# Altium PCB HOST.PcbDoc (part 1 of 2)
Units mil, origin at the board's own origin, x right, y up, seen from the top; angles counter-clockwise.
Board outline 6000 x 4000 mil, 2 copper layers (Top Layer, Bottom Layer); 110 components, 88 nets, 329 pads, 175 vias.
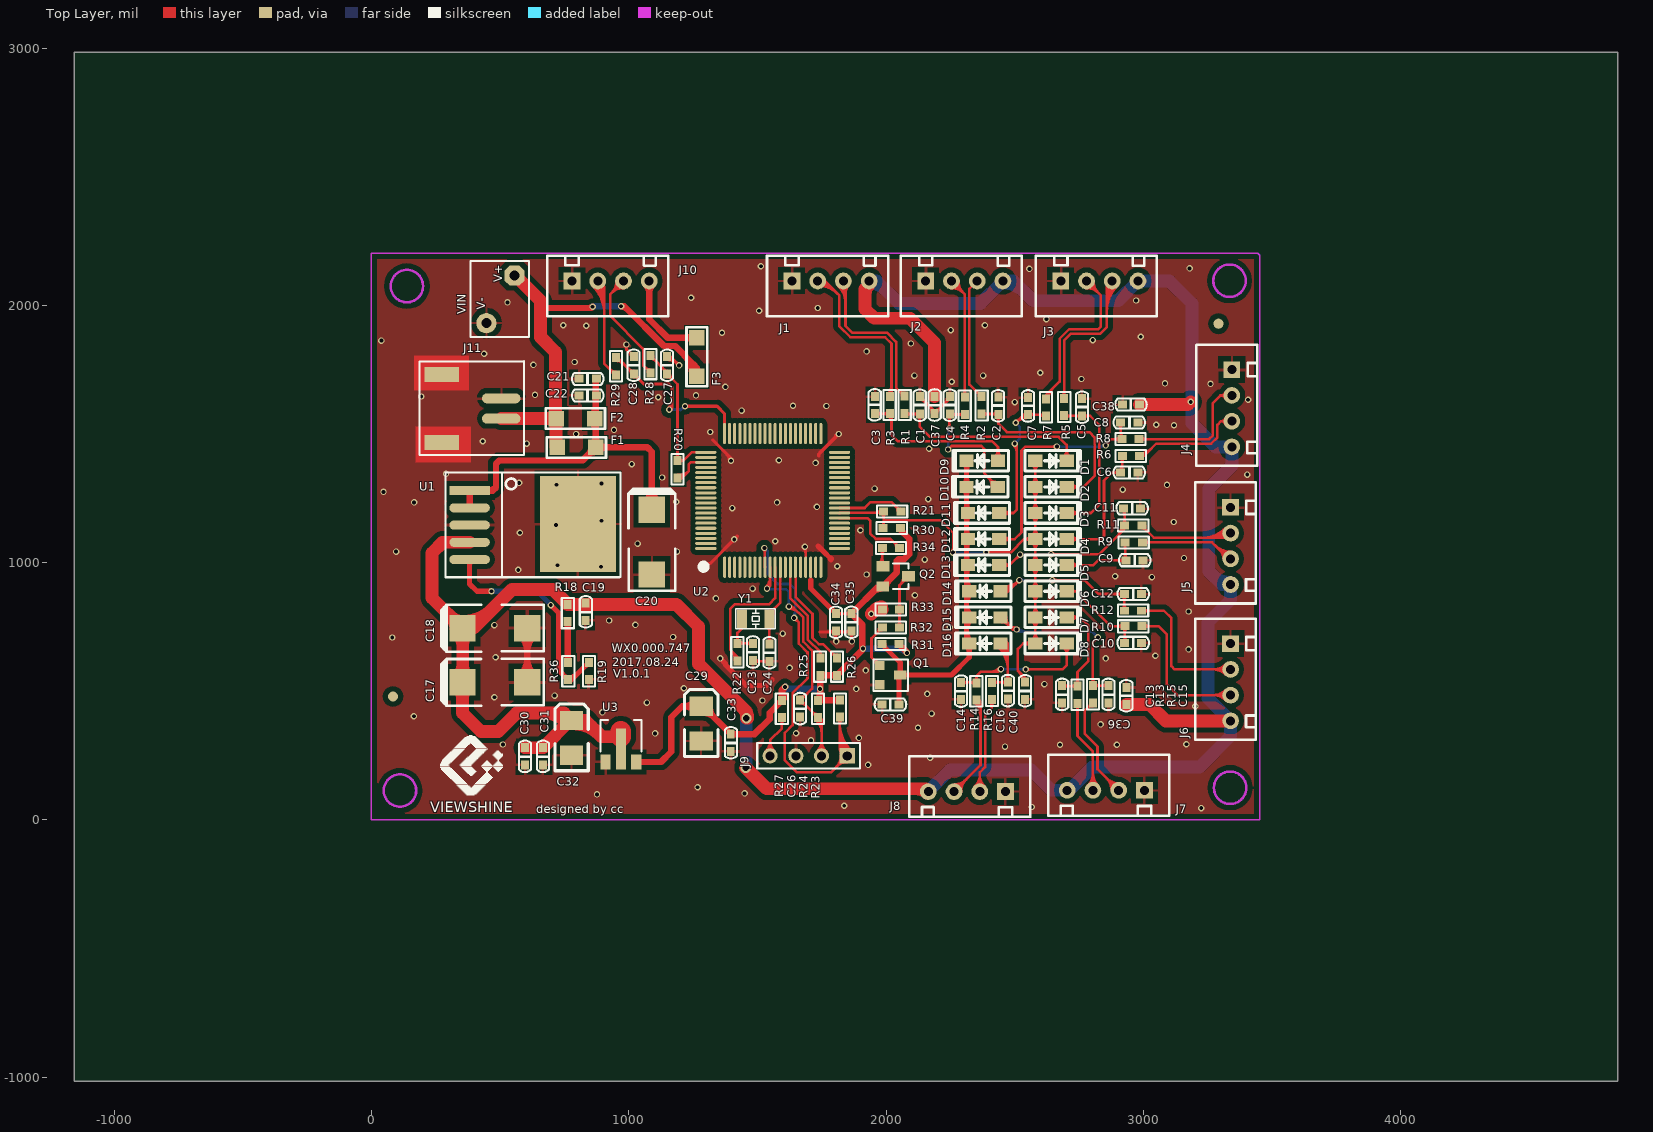
[diagram p0: Top Layer view]
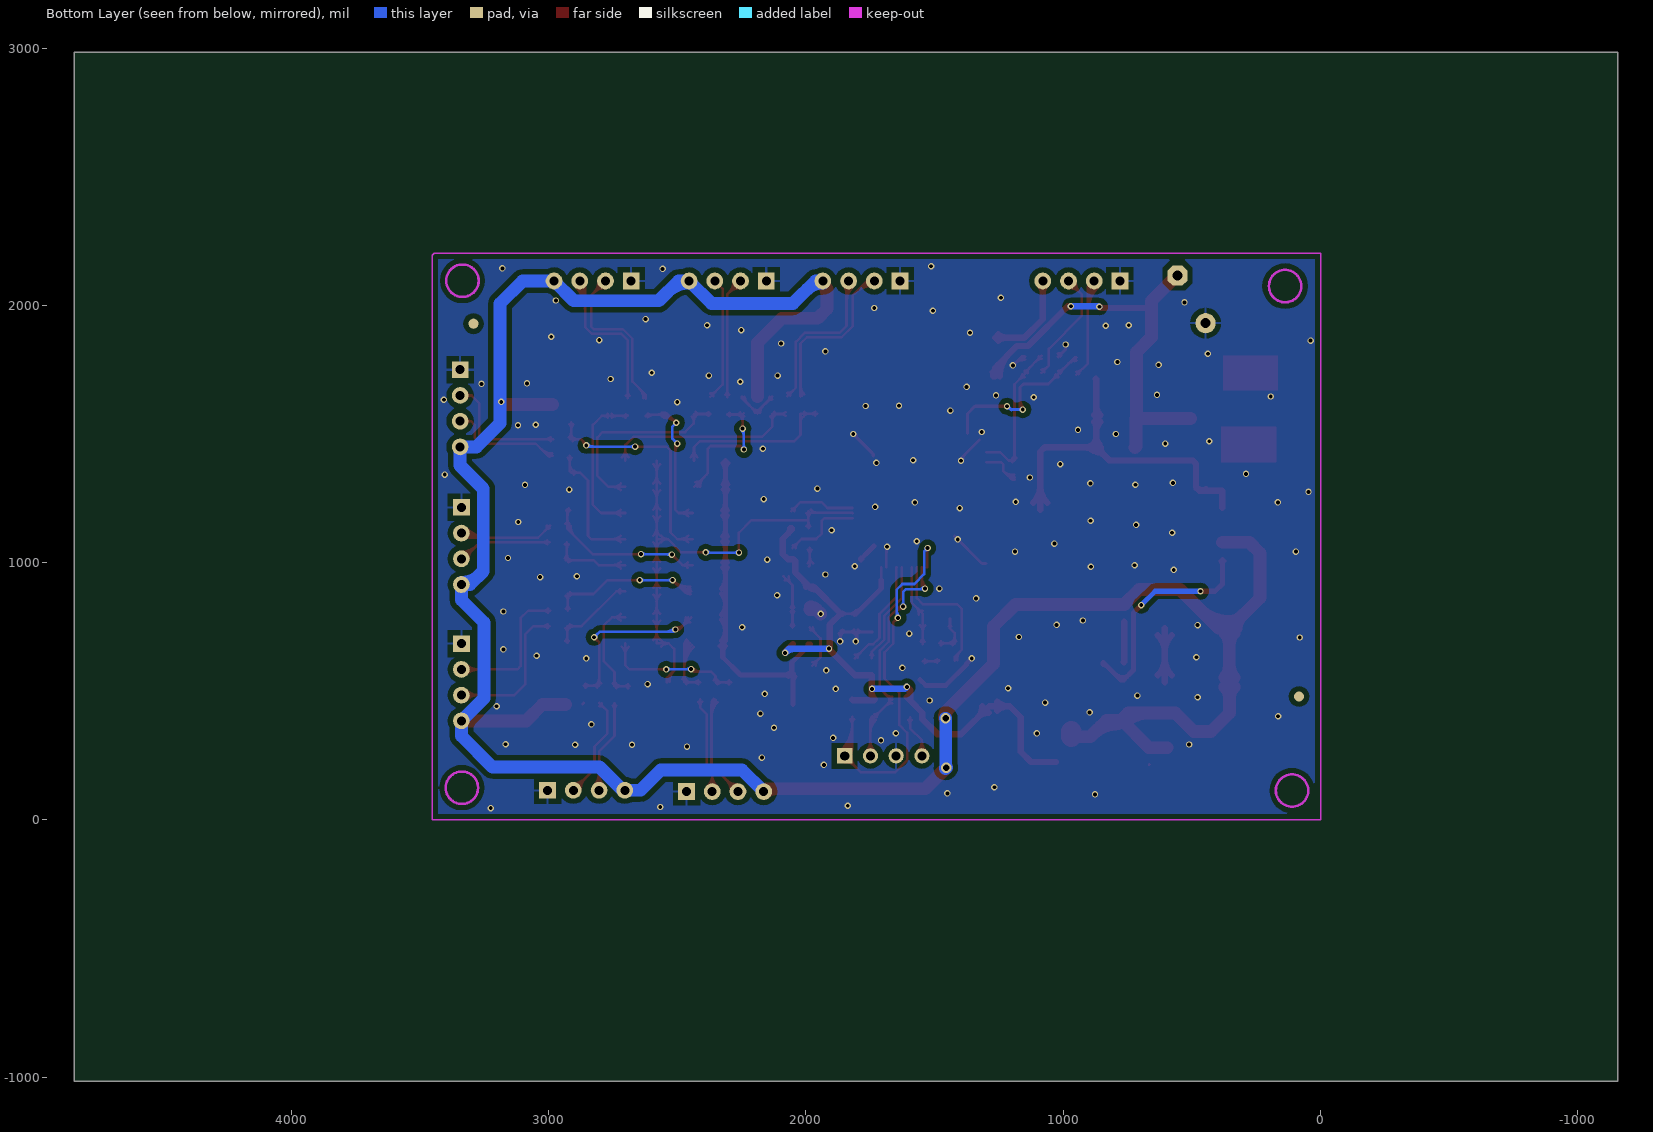
[diagram p1: Bottom Layer view, seen from below]

## Layer stack, top to bottom
Top Solder: solder mask 0.4, Solder Resist, Dk 3.5
Top Layer: signal copper 1.4
Dielectric1: dielectric 12.6, FR-4, Dk 4.8
Bottom Layer: signal copper 1.4
Bottom Solder: solder mask 0.4, Solder Resist, Dk 3.5

## Board outline
-1156,-1016 4844,-1016 4844,2984 -1156,2984

## Design rules (kind name [scope] priority, off if disabled: settings)
Clearance Clearance_1 [inpolygon] p1: gap=20 ignorepadtopadclearanceinfootprint=FALSE except(0: Arc-Hole Track-Hole SMDPad-Hole THPad-Hole Via-Hole Fill-Hole Poly-Hole Region-Hole Text-Hole)
Clearance [All] p2: gap=7.8 ignorepadtopadclearanceinfootprint=FALSE except(0: Arc-Hole Track-Hole SMDPad-Hole THPad-Hole Via-Hole Fill-Hole Poly-Hole Region-Hole Text-Hole)
ComponentClearance [All] p1 off: gap=10 collisioncheckmode=3 verticalgap=10 showdistances=FALSE
PolygonConnect PolygonConnect_1 [Isvia] p1: connectstyle=Direct reliefconductorwidth=10 reliefentries=4 polygonreliefangle="90 Angle" airgapwidth=10
PolygonConnect [All] p2: connectstyle=Relief reliefconductorwidth=10 reliefentries=4 polygonreliefangle="90 Angle" airgapwidth=10
RoutingVias [All] p1: holewidth=15 width=25 viastyle="Through Hole" minholewidth=15 minwidth=25 maxholewidth=28 maxwidth=50
SilkToSilkClearance [All] p1 off: silktosilkclearance=10
SilkToSolderMaskClearance SilkscreenOverComponentPads [IsPad] p1 off: minsilkscreentomaskgap=10 clearancetoexposedcopper=TRUE
SolderMaskExpansion [All] p1: expansion=4
Width [All] p1: maxlimit=500 minlimit=10 preferedwidth=10
27 further rules are at their usual default settings.

## Classes and differential pairs
component class 主机板: C17 C18 C19 C20 C21 C22 C23 C24 C26 C27 C28 C29 C30 C31 C32 C33 C34 C35 F1 F2 F3 J9 J10 J11 R18 R19 R20 R21 R22 R23 R24 R25 R26 R27 R28 R29 R36 U1 U2 U3 VIN Y1
component class 主机板2: C1 C2 C3 C4 C5 C6 C7 C8 C9 C10 C11 C12 C13 C14 C15 C16 C36 C37 C38 C39 C40 D1 D2 D3 D4 D5 D6 D7 D8 D9 D10 D11 D12 D13 D14 D15 D16 J1 J2 J3 J4 J5 J6 J7 J8 Q1 Q2 R1 R2 R3 R4 R5 R6 R7 R8 R9 R10 R11 R12 R13 R14 R15 R16 R30 R31 R32 R33 R34

## Components (designator, comment, footprint, x,y, rotation, side; value= is the part's Value field where it differs from the comment)
C1 "100p" C0603 2131,1645 r270 top
C2 "100p" C0603 2436,1643 r270 top
C3 "100p" C0603 1956,1646 r270 top
C4 "100p" C0603 2247.67,1645 r270 top
C5 "100p" C0603 2762,1637 r270 top
C6 "100p" C0603 2978,1350 r180 top
C7 "100p" C0603 2552,1642 r270 top
C8 "100p" C0603 2978,1545 r180 top
C9 "100p" C0603 2999,1009 r180 top
C10 "100p" C0603 2993,688 r180 top
C11 "100p" C0603 2989,1211 r180 top
C12 "100p" C0603 2993,878 r180 top
C13 "100p" C0603 2684,455 r90 top
C14 "100p" C0603 2291,468 r90 top
C15 "100p" C0603 2864,455 r90 top
C16 "100p" C0603 2473,470 r90 top
C17 "470uF" 7343 479,535 r0 top
C18 "470uF" 7343 479,745 r0 top
C19 "0.1uF" C0603 832,776 r90 top
C20 "220uF/10V" 7343 1089,1080 r270 top
C21 "100P" C0603 807,1715 r0 top
C22 "0.1uF" C0603 807,1650 r0 top
C23 "10Pf" c0603 1482,620 r90 top
C24 "10Pf" c0603 1546,617 r90 top
C26 "0.1μF" C0603 1665,400 r90 top
C27 "100p" C0603 1149,1800 r270 top
C28 "100p" C0603 1019,1800 r270 top
C29 "100uF" 3528 1281,442 r90 top
C30 "0.1uF" C0603 596,214 r90 top
C31 "100p" C0603 666,214 r90 top
C32 "100uF" 3528 777,386 r90 top
C33 "0.1uF" C0603 1396,267 r90 top
C34 "0.1uF" C0603 1805,801 r270 top
C35 "10uF" C0603 1865,801 r270 top
C36 "0.1u" C0603 2934,515 r270 top
C37 "0.1u" C0603 2188.33,1580 r90 top
C38 "0.1u" C0603 2919,1615 r0 top
C39 "100p" C0603 1984,449 r0 top
C40 "100p" C0603 2540,469 r90 top
D1 "DSK14" SOD-123FL 2580,1396 r0 top
D2 "DSK14" SOD-123FL 2580,1294.57 r0 top
D3 "DSK14" SOD-123FL 2580,1193.14 r0 top
D4 "DSK14" SOD-123FL 2580,1091.71 r0 top
D5 "DSK14" SOD-123FL 2580,990.29 r0 top
D6 "DSK14" SOD-123FL 2580,888.86 r0 top
D7 "DSK14" SOD-123FL 2580,787.43 r0 top
D8 "DSK14" SOD-123FL 2580,686 r0 top
D9 "DSK14" SOD-123FL 2435,1396 r180 top
D10 "DSK14" SOD-123FL 2434,1294.57 r180 top
D11 "DSK14" SOD-123FL 2440,1193.14 r180 top
D12 "DSK14" SOD-123FL 2440,1091.71 r180 top
D13 "DSK14" SOD-123FL 2440,990.29 r180 top
D14 "DSK14" SOD-123FL 2445,888.86 r180 top
D15 "DSK14" SOD-123FL 2445,787.43 r180 top
D16 "DSK14" SOD-123FL 2445,686 r180 top
F1 "1A" R1206 796,1448 r0 top
F2 "1A" R1206 792,1560 r0 top
F3 "1A" R1206 1264,1800 r270 top
J1 "Header 4" HDX4-2.54 1784,2095 r90 top
J2 "Header 4" HDX4-2.54 2304,2095 r90 top
J3 "Header 4" HDX4-2.54 2829,2095 r90 top
J4 "Header 4" HDX4-2.54 3344,1600 r0 top
J5 "Header 4" HDX4-2.54 3339,1065 r0 top
J6 "Header 4" HDX4-2.54 3339,535 r0 top
J7 "Header 4" HDX4-2.54 2854,115 r270 top
J8 "Header 4" HDX4-2.54 2314,110 r270 top
J9 "Header 4" HDR1X4 1849,249 r180 top
J10 "Header 4" HDX4-2.54 929,2095 r90 top
J11 "Header 2" SMT2-2.0 504,1560 r90 top
Q1 "9013" SOT-23-TRAN 2010,563 r270 top
Q2 "9012" SOT23-9013 1987,907 r270 top
R1 "22" R0603 2071.67,1580 r90 top
R2 "22" R0603 2371,1578 r90 top
R3 "22" R0603 2014.33,1646 r270 top
R4 "22" R0603 2306,1643 r270 top
R5 "22" R0603 2692,1572 r90 top
R6 "22" R0603 2918,1415 r0 top
R7 "22" R0603 2622,1637 r270 top
R8 "22" R0603 2983,1480 r180 top
R9 "22" R0603 2929,1079 r0 top
R10 "22" R0603 2928,753 r0 top
R11 "22" R0603 2994,1144 r180 top
R12 "22" R0603 2993,813 r180 top
R13 "22" R0603 2744,520 r270 top
R14 "22" R0603 2351,533 r270 top
R15 "22" R0603 2804,455 r90 top
R16 "22" R0603 2411,468 r90 top
R18 "30k" R0603 762,771 r90 top
R19 "10k" R0603 844,545 r90 top
R20 "100" r0603 1189,1330 r90 top
R21 "100" R0603 1990,1199 r0 top
R22 "100K" r0603 1422,685 r270 top
R23 "1K" R0603 1820,400 r90 top
R24 "20kΩ" R0603 1735,465 r270 top
R25 "10k" r0603 1744,629 r270 top
R26 "10k" r0603 1809,629 r270 top
R27 "10Ω" R0603 1595,465 r270 top
R28 "22" R0603 1084,1805 r270 top
R29 "22" R0603 949,1730 r90 top
R30 "1k" r0603 2055,1134 r180 top
R31 "1k" r0603 2050,683 r180 top
R32 "3k" R0603 1985,748 r0 top
R33 "10k" r0603 1985,818 r0 top
R34 "3k" r0603 2052,1057 r180 top
R36 "0" R0603 764,545 r90 top
U1 "SPX29302T5" TO-263-5 432,1146 r270 top
U2 "R7F0C003/4M2DFB" MSP437QFP80 1559,1242 r180 top
U3 "S-1206B33" SOT-89 969,260 r0 top
VIN "Header 2" BATFOOT 444,1990 r90 top
Y1 "32768" XTAL-2S 1546,782 r180 top

## Footprints (in the part's own frame and the unit in brackets; to place one, negate y for a bottom-side part, rotate by r counter-clockwise, add the part's x,y. Pads: shape width x height; smd on the part's side, far side on the other; paste and mask are expansions set on the pad)
3528 [mil]
  rect 75x90 smd: 1(0,0) 2(-135,0)
  silkscreen extent -195,-65 65,65
7343 [mm] "Capacitor, SM Tantalum; Body 7.3 x 4.3 mm (LxW typ)"
  rect 2.6x2.6 smd: 1(-3.2,0) 2(3.2,0)
  silkscreen extent -5.28,-2.3 4.83,2.33, body extent -3.8,-2.29 3.8,2.31, height 3.1
BATFOOT [mm]
  oct 2x2 hole 1: 1(3.199,-2.824)
  round 2 hole 1: 2(-1.5,-0.05)
  silkscreen extent -2.85,-4.28 4.65,1.52
C0603 [mil]
  rect 35x31 smd: 1(-0.49,0) 2(66.51,0)
  silkscreen extent -29,-24 94,23, body extent 1,-15 72,15, height 20
c0603 [mil]
  rect 35x31 smd: 1(-0.49,0) 2(66.51,0)
  silkscreen extent -29,-24 94,23, body extent 1,-15 72,15, height 20
HDR1X4 [mm] "Connector; Header; 4 Position"
  rect 1.5x1.5 hole 0.9: 1(0,0)
  round 1.5 hole 0.9: 2(2.54,0) 3(5.08,0) 4(7.62,0)
  silkscreen extent -1.27,-1.27 8.89,1.27
HDX4-2.54 [mil]
  rect 65x65 hole 35: 1(0,150)
  round 65 hole 35: 2(0,50) 3(0,-50) 4(0,-150)
  silkscreen extent -138,-224 98,247
MSP437QFP80 [mm]
  oval 0.3x2.1 smd: 1(4.75,6.6) 2(4.25,6.6) 3(3.75,6.6) 4(3.25,6.6) 5(2.75,6.6) 6(2.25,6.6) 7(1.75,6.6) 8(1.25,6.6) 9(0.75,6.6) 10(0.25,6.6) 11(-0.25,6.6) 12(-0.75,6.6) 13(-1.25,6.6) 14(-1.75,6.6) 15(-2.25,6.6) 16(-2.75,6.6) 17(-3.25,6.6) 18(-3.75,6.6) 19(-4.25,6.6) 20(-4.75,6.6) 41(-4.75,-6.6) 42(-4.25,-6.6) 43(-3.75,-6.6) 44(-3.25,-6.6) 45(-2.75,-6.6) 46(-2.25,-6.6) 47(-1.75,-6.6) 48(-1.25,-6.6) 49(-0.75,-6.6) 50(-0.25,-6.6) 51(0.25,-6.6) 52(0.75,-6.6) 53(1.25,-6.6) 54(1.75,-6.6) 55(2.25,-6.6) 56(2.75,-6.6) 57(3.25,-6.6) 58(3.75,-6.6) 59(4.25,-6.6) 60(4.75,-6.6)
  oval 2.1x0.3 smd: 21(-6.6,4.75) 22(-6.6,4.25) 23(-6.6,3.75) 24(-6.6,3.25) 25(-6.6,2.75) 26(-6.6,2.25) 27(-6.6,1.75) 28(-6.6,1.25) 29(-6.6,0.75) 30(-6.6,0.25) 31(-6.6,-0.25) 32(-6.6,-0.75) 33(-6.6,-1.25) 34(-6.6,-1.75) 35(-6.6,-2.25) 36(-6.6,-2.75) 37(-6.6,-3.25) 38(-6.6,-3.75) 39(-6.6,-4.25) 40(-6.6,-4.75) 61(6.6,-4.75) 62(6.6,-4.25) 63(6.6,-3.75) 64(6.6,-3.25) 65(6.6,-2.75) 66(6.6,-2.25) 67(6.6,-1.75) 68(6.6,-1.25) 69(6.6,-0.75) 70(6.6,-0.25) 71(6.6,0.25) 72(6.6,0.75) 73(6.6,1.25) 74(6.6,1.75) 75(6.6,2.25) 76(6.6,2.75) 77(6.6,3.25) 78(6.6,3.75) 79(6.6,4.25) 80(6.6,4.75)
  silkscreen extent 6.52,6.25 7.12,6.85
R0603 [mil]
  rect 35x31 smd: 1(0,0) 2(67,0)
  silkscreen extent -26,-24 92,23, body extent 0,-15 71,15, height 12
r0603 [mil]
  rect 35x31 smd: 1(0,0) 2(67,0)
  silkscreen extent -26,-24 92,23, body extent 0,-15 71,15, height 12
R1206 [mil]
  rect 60x60 smd: 1(-75,0) 2(75,0)
  silkscreen extent -115,-40 115,40, body extent -87,-29 91,29, height 20
SMT2-2.0 [mm]
  oval 1x3.8 smd: 1(0,0) 2(2,0)
  rect 1.5x3.4 smd: 3(4.35,5.9) 4(-2.35,5.9)
  silkscreen extent -3.57,-2.25 5.67,8.1
SOD-123FL [mm]
  rect 1.4x1.2 smd: 1(0,0) 2(3.1,0)
  silkscreen extent -1.02,-1.02 4.44,1.02, body extent -0.2,-0.81 3.4,0.84, height 0.95
SOT23-9013 [mil]
  rect 40x50 smd: 1(0,0) 2(-79.36,0.8) 3(-40,100)
  silkscreen extent -90,40 10,100
SOT-23-TRAN [mil]
  rect 36x36 smd: B(-37,-35) E(38,-35)
  rect 36x50 smd: C(0,45)
  silkscreen extent -60,-59 62,75, body extent -44,-35 44,45, height 39
SOT-89 [mil]
  rect 40x60 smd: 1(-60,-35) 3(60,-35)
  rect 40x160.63 smd: 2(0,15.32)
  Top Layer lines w80: 0,62.98 0,84.62
  silkscreen extent -80,5 80,128
TO-263-5 [mm]
  rect 9.5x7.5 smd: 0(-0.1,9.398)
  rect 0.9x4 smd: 1(-3.4,-1.3)
  oval 0.9x4 smd: 2(-1.7,-1.3) 3(0,-1.3) 4(1.7,-1.3) 5(3.4,-1.3)
  silkscreen extent -5.2,-3.67 5.15,13.6
XTAL-2S [mm]
  rect 1x1.8 smd: 1(0,0) 2(2.7,0)
  silkscreen extent -0.6,-1 3.3,1

## Part data
C1 C2 C3 C4 C5 C6 C7 C8 C9 C10 C11 C12 C13 C14 C15 C16 C19 C21 C22 C27 C28 C30 C31 C33 C34 C35 C36 C37 C38 C39 C40: library part CAP, "无极性电容"
C17 C18 C20 C29 C32: library part CAP-POL2, "钽电容"
C23 C24: library part CAP1
C26: library part CAP, "Capacitor"
D1 D2 D3 D4 D5 D6 D7 D8 D9 D10 D11 D12 D13 D14 D15 D16: library part DIODE, "二极管，Diode"
F1 F2 F3: library part FUSE
J1 J2 J3 J4 J5 J6 J7 J8 J9 J10: "Header, 4-Pin"
J11 VIN: "Header, 2-Pin"
Q1: library part NPN-S, "NPN Transistor"
R1 R2 R3 R4 R5 R6 R7 R8 R9 R10 R11 R12 R13 R14 R15 R16 R18 R19 R20 R21 R22 R28 R29 R32 R36: library part RES
R23 R24 R27: library part RES11
R25 R26 R30 R31 R33 R34: library part RES2
U3: library part VOLTRER1
Y1: library part XTAL1, "晶振,2PIN"

## Free pads (board coordinates)
  round 39.37 all layers, no hole mask+0.39: 0(82.92,479.84) 0(3291.92,1928.84)

## Via types
v1: diameter 25, hole 15, Top Layer to Bottom Layer, tented both sides, 173 vias
v2: diameter 40, hole 25, Top Layer to Bottom Layer, tented both sides, 2 vias

## Nets (pads, with @x,y where several pads share a name; then routed paths per layer and width w, separated by ;. In a path a pad name is that pad's centre, name@x,y a point inside that pad or via, vN(x,y) a via of type N, cw(c..) or ccw(c..) an arc to the next point about the centre after c; other vN are vias at no path point)
CHEAK_POWER: U2.76
CHEAK_RF_POWER: U2.73
CLOSE: U2.38
CSB_IRDA_EN: U2.74
EEPROM_POWER: U2.44
EEPROM_SCL: U2.48
EEPROM_SDA: U2.47
GND: C1.1 C2.1 C3.1 C4.1 C5.1 C6.1 C7.1 C8.1 C9.1 C10.1 C11.1 C12.1 C13.1 C14.1 C15.1 C16.1 C17.2 C18.2 C19.1 C20.2 C21.1 C22.1 C23.1 C24.1 C26.1 C27.1 C28.1 C29.2 C30.1 C31.1 C32.2 C33.1 C34.2 C35.2 C36.1 C37.1 C38.1 C39.1 C40.1 J1.1 J2.1 J3.1 J4.1 J5.1 J6.1 J7.1 J8.1 J9.3 J10.1 J11.2 J11.3 J11.4 Q1.E R19.1 R33.1 U1.0 U1.3 U2.17 U3.1 VIN.2 | length 2882.8
  Top Layer w10: C23.1@1482,619.51 1485,616.51 C24.1@1546,616.51 ; C23.1@1489.42,610.08 cw(c1504.93,594.57) 1504.93,616.51 ; C23.1@1489.42,624.93 ccw(c1509.76,645.27) 1509.76,616.51 ; C24.1@1538.58,609.08 ccw(c1520.65,591.16) 1520.65,616.51 ccw(c1520.65,641.86) C24.1@1538.58,623.93 ; v1@1678.7,1056.7 cw(c1658.76,1036.76) 1686.95,1036.76 ; v1(1684,1062) 1686.95,1059.05 U2.17@1686.95,982.16 ; v1@1801.02,698.75 cw(c1837.07,698.75) C34.2@1812.23,724.88 ; 1801.02,716.76 ccw(c1789.26,716.76) C34.2@1797.58,725.07 ; C34.2@1801.02,724.13 ccw(c1836.13,724.13) v1@1811.3,699.3 ; v1(1806,694) 1801.02,698.98 1801.02,730.51 1742,730.51 1861.02,730.51 C35.2@1865,734.49 1865,696 v1(1867,694) ; C34.2@1812.42,725.07 cw(c1825.56,711.93) 1825.56,730.51 ; C34.2@1812.42,739.92 ccw(c1835.13,762.63) 1835.13,730.51 ; 1834.87,730.51 ccw(c1834.87,762.63) C35.2@1857.58,739.92 ; 1844.44,730.51 cw(c1844.44,711.93) 1857.58,725.07 cw(c1839.65,707.14) 1865,707.14 cw(c1890.35,707.14) C35.2@1872.42,725.07 ; v1@1861.7,699.3 ccw(c1853.72,707.28) 1865,707.28 ; 1865,716.93 ccw(c1889.93,716.93) v1@1872.3,699.3 ; C15.1@2864,454.51 C15.1@2868,450.51 ; C34.2@1797.58,725.07 ccw(c1784.44,711.93) 1784.44,730.51 cw(c1784.44,711.93) C34.2@1797.58,725.07 ; 1774.87,730.51 ccw(c1774.87,762.63) 1797.58,739.92 cw(c1774.87,762.63) 1774.87,730.51
  Top Layer w12: C31.1@664.51,215 C31.1@666,213.51 ; v1@985.4,1843.4 cw(c974.31,1832.31) 990,1832.31 cw(c1005.69,1832.31) v1@994.6,1843.4 ; v1(990,1848) 990,1829.49 C28.1@1019,1800.49 ; 999.37,1820.12 ccw(c1019,1839.75) C28.1@1019,1811.99 ; C28.1@1004.2,1815.29 cw(c991.39,1802.49) C28.1@1009.5,1802.49 ; C27.1@1149,1788.99 cw(c1149,1731.03) v1@1189.99,1772.01 ; C27.1@1149,1800.49 1161.51,1800.49 v1(1195,1767) ; C27.1@1149,1800.99 cw(c1149,1772) 1169.5,1792.5 ; v1@1188.5,1767 ccw(c1172.81,1767) 1183.9,1778.1 ccw(c1195,1789.19) v1@1195,1773.5 ; 1299,997 1316,997 1331.5,1012.5 ; 1325,1006 1331.5,1012.5 ; 1326,1477 1397,1406 v1(1397,1396) ; 1378.83,1424.17 cw(c1350.67,1396) v1@1390.5,1396 ; v1@1403.12,1090.62 cw(c1387.43,1090.62) 1398.53,1079.53 cw(c1409.62,1068.43) v1@1409.62,1084.12 ; v1@1409.62,1097.12 ccw(c1409.62,1112.82) 1420.72,1101.72 ccw(c1431.82,1090.62) v1@1416.12,1090.62 ; 1423,1104 v1(1409.62,1090.62) 1331.5,1012.5 ; 1738,1415 1738,1422 1795.5,1479.5 ; C1.1@2131,1633.99 cw(c2131,1606.23) 2150.63,1625.86 ; C1.1@2131,1645.49 2188.33,1588.16 C37.1@2188.33,1579.51 2247.67,1638.84 C4.1@2247.67,1645.49 ; C1.1@2140.5,1643.49 ccw(c2158.61,1643.49) C1.1@2145.8,1630.69 ; 2167.41,1609.08 cw(c2139.85,1581.51) C37.1@2178.83,1581.51 ; C37.1@2188.33,1591.01 ccw(c2188.33,1618.77) 2207.96,1599.14 ; C37.1@2197.83,1581.51 cw(c2215.94,1581.51) C37.1@2203.14,1594.31 ; 2228.16,1619.34 ccw(c2204.01,1643.49) C4.1@2238.17,1643.49
  Top Layer w15: 1745,1429 1795.5,1479.5 1804,1488 1804,1495
  Top Layer w20: v1(1355,628) 1376,607 1376,603 1456,523 1534,523 1556,545 ; 1735,1065 1756.2,1043.8 1785,1015 1785,1011
  Top Layer w25: C17.2@577.63,562.35 ccw(c511.6,628.38) 604.98,628.38 ccw(c698.37,628.38) C17.2@632.34,562.35 ; C18.2@577.63,717.65 cw(c511.6,651.62) 604.98,651.62 cw(c698.37,651.62) C18.2@632.34,717.65 ; C17.2@604.98,535 C18.2@604.98,745 ; 1785,1015 1785,1015.66
  Top Layer w50: v1(1942,801) 1959,818 R33.1@1985,818 ; 1958.25,817.25 cw(c1983,792.49) 1983,827.5 ccw(c1983,792.49) 1958.25,817.25
  other v1: 3225,46 2566,50 1837,55 876,99 1450,103 1267,127 1930,214 2171,242 2462,285 2676,292 2897,292 510,293 3167,294 1708,309 1894,319 1102,336 1650,337 2124,358 2834,371 164,403 2177,413 897,418 3202,442 1070,456 1519,464 477,477 711,483 2160,490 1884,509 1214,512 2615,528 1921,581 1625,591 2854,628 482,632 3047,638 3176,663 80,709 1172,711 1598,724 2248,749 477,757 1025,758 923,775 3176,810 1338,861 2112,873 1481,899 3033,944 2890,947 1924,954 570,972 892,984 1810,986 722,990 2150,1012 3158,1018 95,1043 1187,1043 1034,1074 1569,1083 576,1116 1900,1126 716,1147 3118,1158 893,1163 1402,1212 1731,1217 165,1234 1576,1234 1184,1236 2164,1247 46,1275 2920,1284 1955,1288 3092,1302 719,1303 894,1308 573,1310 1129,1331 3404,1342 289,1345 1011,1383 1726,1388 1583,1398 2167,1443 603,1463 432,1472 795,1500 1816,1500 1316,1508 942,1516 3119,1534 3050,1536 1438,1591 1768,1609 1638,1610 2500,1624 3407,1633 1114,1643 193,1646 1261,1650 635,1652 1375,1683 3261,1695 3084,1697 2255,1703 2759,1714 2110,1727 2377,1727 2599,1738 629,1769 789,1780 437,1812 1924,1821 2096,1852 38,1863 2803,1865 2990,1878 1362,1894 2251,1904 834,1921 745,1923 2384,1923 2623,1947 1506,1979 1734,1990 528,2012 2972,2019 1242,2030 2557,2142 3180,2144 1513,2152
HIC1_EXT: U2.59
HIC1_RXD: U2.57
HIC1_TXD: U2.58
HOST_RXD: C40.2 D1.1 D2.1 D3.1 D4.1 D5.1 D6.1 D7.1 D8.1 R21.1 R30.2 U2.28 | length 3293
  Top Layer w10: U2.28@1818.84,1192.79 1819.82,1193.77 1984.77,1193.77 R21.1@1990,1199 1990,1164 ; 1950.02,1193.77 ccw(c1950.02,1236.98) R21.1@1980.58,1206.42 ; R30.2@1982.58,1141.42 ccw(c1964.65,1159.35) 1990,1159.35 ccw(c2015.35,1159.35) R30.2@1997.42,1141.42 ; R21.1@1982.58,1191.58 cw(c1964.65,1173.65) 1990,1173.65 cw(c2015.35,1173.65) R21.1@1997.42,1191.58 ; R30.2@1988,1134 1990,1136 1990,1164 ; v1@2254.7,1044.3 ccw(c2239.48,1059.52) 2261,1059.52 ; v1(2260,1039) 2261,1040 2261,1051 2261,1116 2213,1164 1990,1164 ; 2261,1054.69 ccw(c2275.69,1054.69) v1@2265.3,1044.3 ; v1(2389,1040) 2485,1040 2536.71,1091.71 ; v1@2394.3,1034.7 cw(c2407.11,1021.89) 2407.11,1040 cw(c2407.11,1058.11) v1@2394.3,1045.3 ; 2511.83,580.17 cw(c2469.17,537.51) C40.2@2529.5,537.51 ; 2528.9,563.1 cw(c2503.31,537.51) C40.2@2539.5,537.51 ; C40.2@2540,535.51 2540,552 2512,580 2512,665 2533,686 ; D4.1@2561.66,1079.91 ccw(c2536.72,1059.46) 2536.72,1091.71 ; D4.1@2561.66,1103.52 cw(c2536.72,1123.97) 2536.72,1091.71 ; D8.1@2562.49,673.25 ccw(c2533,645.53) 2533,686 ; D8.1@2562.49,698.75 cw(c2533,726.47) 2533,686 ; D8.1@2566.83,699.17 ccw(c2535.04,730.96) 2580,730.96 ccw(c2624.96,730.96) D8.1@2593.17,699.17 ; D7.1@2566.83,774.26 cw(c2535.04,742.47) 2580,742.47 cw(c2624.96,742.47) D7.1@2593.17,774.26 ; D7.1@2566.83,800.6 ccw(c2535.04,832.39) 2580,832.39 ccw(c2624.96,832.39) D7.1@2593.17,800.6 ; D6.1@2566.83,875.69 cw(c2535.04,843.9) 2580,843.9 cw(c2624.96,843.9) D6.1@2593.17,875.69 ; D6.1@2566.83,902.02 ccw(c2535.04,933.81) 2580,933.81 ccw(c2624.96,933.81) D6.1@2593.17,902.02 ; D5.1@2566.83,977.12 cw(c2535.04,945.33) 2580,945.33 cw(c2624.96,945.33) D5.1@2593.17,977.12 ; D5.1@2566.83,1003.45 ccw(c2535.04,1035.24) 2580,1035.24 ccw(c2624.96,1035.24) D5.1@2593.17,1003.45 ; D4.1@2566.83,1078.55 cw(c2535.04,1046.76) 2580,1046.76 cw(c2624.96,1046.76) D4.1@2593.17,1078.55 ; D4.1@2566.83,1104.88 ccw(c2535.04,1136.67) 2580,1136.67 ccw(c2624.96,1136.67) D4.1@2593.17,1104.88 ; D3.1@2566.83,1179.97 cw(c2535.04,1148.18) 2580,1148.18 cw(c2624.96,1148.18) D3.1@2593.17,1179.97 ; D3.1@2566.83,1206.31 ccw(c2535.04,1238.1) 2580,1238.1 ccw(c2624.96,1238.1) D3.1@2593.17,1206.31 ; D2.1@2566.83,1281.4 cw(c2535.04,1249.61) 2580,1249.61 cw(c2624.96,1249.61) D2.1@2593.17,1281.4 ; D2.1@2566.83,1307.74 ccw(c2535.04,1339.53) 2580,1339.53 ccw(c2624.96,1339.53) D2.1@2593.17,1307.74 ; D1.1@2566.83,1382.83 cw(c2535.04,1351.04) 2580,1351.04 cw(c2624.96,1351.04) D1.1@2593.17,1382.83 ; D1.1@2580,1396 D2.1@2580,1294.57 D3.1@2580,1193.14 D4.1@2580,1091.71 ; 2533,686 D8.1@2580,686 D7.1@2580,787.43 D6.1@2580,888.86 D5.1@2580,990.29 D4.1@2580,1091.71 ; 2536.71,1091.71 D4.1@2580,1091.71
  Bottom Layer w10: v1(2260,1039) 2292,1039 2389,1039 v1(2389,1040) ; v1@2265.3,1033.7 cw(c2278.11,1020.89) 2278.11,1039 cw(c2278.11,1057.11) v1@2265.3,1044.3 ; 2368.48,1039 ccw(c2368.48,1060.52) v1@2383.7,1045.3 ; 2373.31,1039 cw(c2373.31,1024.31) v1@2383.7,1034.7
HOST_RXD1: C1.2 D1.2 R1.1 | length 947.6
  Top Layer w10: R1.1@2079.09,1570.58 cw(c2097.02,1552.65) 2097.02,1578 cw(c2097.02,1603.35) R1.1@2079.09,1585.42 ; R1.1@2086,1578 C1.2@2131,1578 ; 2104.47,1578 ccw(c2104.47,1605.03) C1.2@2123.58,1585.92 ; 2106.84,1578 cw(c2106.84,1554.33) C1.2@2123.58,1571.07 ; C1.2@2123.58,1569.07 cw(c2105.65,1551.14) 2131,1551.14 cw(c2156.35,1551.14) C1.2@2138.42,1569.07 ; C1.2@2131,1578.49 C1.2@2131,1578 ; D1.2@2688.88,1409.17 ccw(c2657.09,1440.96) 2702.05,1440.96 ccw(c2747,1440.96) D1.2@2715.21,1409.17 ; D1.2@2702.05,1396 2702.05,1457.95 2670.8,1489.2 2169.8,1489.2 2131,1528 C1.2@2131,1578
HOST_RXD2: C2.2 D2.2 R2.1 | length 963.4
  Top Layer w10: R2.1@2371,1578 2434.49,1578 C2.2@2436,1576.49 2436,1541 2470,1507 2790,1507 2810.2,1486.8 2810.2,1337 2767.77,1294.57 D2.2@2702.05,1294.57 ; R2.1@2378.42,1570.58 cw(c2396.35,1552.65) 2396.35,1578 cw(c2396.35,1603.35) R2.1@2378.42,1585.42 ; 2409.47,1578 ccw(c2409.47,1605.03) C2.2@2428.58,1585.92 ; 2411.84,1578 cw(c2411.84,1554.33) C2.2@2428.58,1571.07 ; C2.2@2428.58,1567.07 cw(c2410.65,1549.14) 2436,1549.14 cw(c2461.35,1549.14) C2.2@2443.42,1567.07 ; D2.2@2719.15,1281.4 cw(c2750.94,1249.61) 2750.94,1294.57 cw(c2750.94,1339.53) D2.2@2719.15,1307.74
HOST_RXD3: C5.2 D3.2 R5.1 | length 791.1
  Top Layer w10: R5.1@2692,1572 2693.51,1570.49 C5.2@2762,1570.49 2793.51,1570.49 2828,1536 2828,1225 2796.14,1193.14 D3.2@2702.05,1193.14 ; R5.1@2699.42,1562.58 cw(c2718.53,1543.47) 2718.53,1570.49 ; R5.1@2699.42,1577.42 ccw(c2716.16,1594.16) 2716.16,1570.49 ; D3.2@2719.15,1179.97 cw(c2750.94,1148.18) 2750.94,1193.14 cw(c2750.94,1238.1) D3.2@2719.15,1206.31 ; C5.2@2754.58,1563.07 ccw(c2736.65,1545.14) 2736.65,1570.49 ccw(c2736.65,1595.84) C5.2@2754.58,1577.92 ; C5.2@2769.42,1563.07 cw(c2787.35,1545.14) 2787.35,1570.49 cw(c2787.35,1595.84) C5.2@2769.42,1577.92
HOST_RXD4: C6.2 D4.2 R6.1 | length 692.3
  Top Layer w10: D4.2@2702.05,1091.71 2834.71,1091.71 2847,1104 2847,1319 2878,1350 C6.2@2911.49,1350 2918,1356.51 R6.1@2918,1415 ; D4.2@2719.15,1078.55 cw(c2750.94,1046.76) 2750.94,1091.71 cw(c2750.94,1136.67) D4.2@2719.15,1104.88 ; C6.2@2902.07,1342.58 ccw(c2884.14,1324.65) 2884.14,1350 ccw(c2884.14,1375.35) C6.2@2902.07,1357.42 ; C6.2@2906.07,1357.42 ccw(c2877.26,1386.23) 2918,1386.23 ; R6.1@2910.58,1407.58 cw(c2892.65,1389.65) 2918,1389.65 cw(c2943.35,1389.65) R6.1@2925.42,1407.58
HOST_RXD5: C9.2 D5.2 R9.1 | length 499.7
  Top Layer w10: D5.2@2702.05,990.29 2805.29,990.29 2824,1009 C9.2@2932.49,1009 2929,1012.49 R9.1@2929,1079 ; D5.2@2719.15,977.12 cw(c2750.94,945.33) 2750.94,990.29 cw(c2750.94,1035.24) D5.2@2719.15,1003.45 ; R9.1@2921.58,1071.58 cw(c2903.65,1053.65) 2929,1053.65 cw(c2954.35,1053.65) R9.1@2936.42,1071.58 ; C9.2@2923.07,1001.58 ccw(c2905.14,983.65) 2905.14,1009 ccw(c2905.14,1034.35) 2923.07,1016.42 ccw(c2908.74,1030.75) 2929,1030.75 ; 2929,1037.95 ccw(c2959.44,1037.95) C9.2@2937.92,1016.42
HOST_RXD6: C10.2 D6.2 R10.1 | length 500.7
  Top Layer w10: D6.2@2702.05,888.86 2736.14,888.86 ; D6.2@2722.63,880.52 cw(c2736.14,873.75) 2736.14,888.86 ; D6.2@2722.63,897.2 ccw(c2736.14,903.97) 2736.14,888.86 ; R10.1@2918.58,745.58 ccw(c2900.65,727.65) 2900.65,753 ccw(c2900.65,778.35) R10.1@2918.58,760.42 ; R10.1@2920.58,745.58 cw(c2902.65,727.65) 2928,727.65 cw(c2953.35,727.65) R10.1@2935.42,745.58 ; C10.2@2921.07,695.42 ccw(c2904.33,712.16) 2928,712.16 ; C10.2@2926.49,688 2928,689.51 R10.1@2928,753 2872,753 2736.14,888.86 ; 2928,714.53 ccw(c2955.03,714.53) C10.2@2935.92,695.42
HOST_RXD7: C13.2 D7.2 R13.1 | length 598.9
  Top Layer w10: C13.2@2685.51,520 R13.1@2744,520 2744,575 2786,617 2786,756 2754.57,787.43 D7.2@2702.05,787.43 ; C13.2@2691.42,512.08 cw(c2710.53,492.97) 2710.53,520 ; C13.2@2691.42,526.93 ccw(c2708.16,543.67) 2708.16,520 ; D7.2@2719.15,774.26 cw(c2750.94,742.47) 2750.94,787.43 cw(c2750.94,832.39) D7.2@2719.15,800.6 ; R13.1@2736.58,512.58 ccw(c2718.65,494.65) 2718.65,520 ccw(c2718.65,545.35) R13.1@2736.58,527.42 ; R13.1@2736.58,529.42 ccw(c2718.65,547.35) 2744,547.35 ccw(c2769.35,547.35) R13.1@2751.42,529.42
HOST_RXD8: C14.2 D8.2 R14.1 | length 884.1
  Top Layer w10: C14.2@2291,534.51 2349.49,534.51 R14.1@2351,533 2351,559 ; C14.2@2298.42,527.08 cw(c2316.35,509.16) 2316.35,534.51 cw(c2316.35,559.86) C14.2@2298.42,541.93 ; 2324.47,534.51 ccw(c2324.47,561.53) R14.1@2343.58,542.42 ; 2326.84,534.51 cw(c2326.84,510.84) R14.1@2343.58,527.58 ; R14.1@2343.87,542.71 ccw(c2328.82,559) 2351,559 ; R14.1@2358.13,542.71 cw(c2373.18,559) 2351,559 ; 2403.75,576 ccw(c2403.75,628.25) v1@2440.7,591.3 ; 2427.89,576 ccw(c2427.89,604.11) v1@2447.77,584.23 ; v1(2446,586) 2436,576 2368,576 2351,559 ; v1(2543,585) 2686,585 2702.05,601.05 D8.2@2702.05,686 ; v1@2548.3,579.7 cw(c2561.11,566.89) 2561.11,585 cw(c2561.11,603.11) v1@2548.3,590.3 ; D8.2@2688.88,672.83 cw(c2657.09,641.04) 2702.05,641.04 cw(c2747,641.04) D8.2@2715.21,672.83
  Bottom Layer w10: v1(2446,586) 2487,586 ; v1@2451.3,580.7 cw(c2464.11,567.89) 2464.11,586 cw(c2464.11,604.11) v1@2451.3,591.3 ; 2495,586 2487,586 ; 2522.48,586 cw(c2522.48,564.48) v1@2537.7,579.7 ; 2527.31,586 ccw(c2527.31,600.69) v1@2537.7,590.3 ; v1(2543,585) 2542,586 2487,586
HOST_TXD: R34.1 U2.27 | length 349.8
  Top Layer w10: U2.27@1818.84,1173.1 1875,1173.1 1927.9,1173.1 1938,1163 1938,1114 1960,1092 2017,1092 R34.1@2052,1057 ; 2030.66,1078.34 cw(c2009.32,1057) R34.1@2039.5,1057 ; 2035.49,1073.51 ccw(c2050,1088.02) R34.1@2050,1067.5
HOST_TXD1: C3.2 D9.1 R3.2 | length 834.6
  Top Layer w10: C3.2@1956,1579.49 1956.49,1579 2021,1579 2021,1547 ; C3.2@1963.42,1572.07 cw(c1980.16,1555.33) 1980.16,1579 ; C3.2@1963.42,1586.92 ccw(c1982.53,1606.03) 1982.53,1579 ; R3.2@2006.91,1571.58 ccw(c1988.98,1553.65) 1988.98,1579 ccw(c1988.98,1604.35) R3.2@2006.91,1586.42 ; R3.2@2008.83,1568.06 cw(c1995.41,1546.27) 2021,1546.27 ; 2021,1523 2021,1547 ; D9.1@2421.83,1409.17 ccw(c2390.04,1440.96) 2435,1440.96 ccw(c2479.96,1440.96) D9.1@2448.17,1409.17 ; D9.1@2435,1396 2435,1449.4 2413,1471.4 2046.6,1471.4 2021,1497 2021,1547
HOST_TXD2: C4.2 D10.1 R4.2 | length 986.4
  Top Layer w10: C4.2@2240.24,1569.07 cw(c2226.34,1555.16) 2246,1555.16 ; v1@2240.7,1526.3 ccw(c2227.89,1539.11) 2246,1539.11 ccw(c2264.11,1539.11) v1@2251.3,1526.3 ; v1(2241,1440) 2254.6,1453.6 2370,1453.6 2381,1442.6 2381,1347.57 D10.1@2434,1294.57 2386,1342.57 ; C4.2@2241,1581.49 C4.2@2246.49,1576 ; v1(2246,1521) 2246,1575.51 C4.2@2246.49,1576 ; 2246,1547.12 cw(c2277.04,1547.12) 2255.09,1569.07 cw(c2271.83,1552.33) 2271.83,1576 ; C4.2@2255.09,1583.92 ccw(c2274.2,1603.03) 2274.2,1576 ; R4.2@2298.58,1568.58 ccw(c2280.65,1550.65) 2280.65,1576 ccw(c2280.65,1601.35) R4.2@2298.58,1583.42 ; R4.2@2306,1576 C4.2@2246.49,1576 ; 2395.49,1333.08 cw(c2356.98,1294.57) 2411.44,1294.57 ccw(c2356.98,1294.57) 2395.49,1333.08 ; 2404.99,1323.58 ccw(c2430.06,1348.65) 2430.06,1313.19 cw(c2430.06,1348.65) 2404.99,1323.58 ; D10.1@2412.56,1316.01 cw(c2391.12,1294.57) 2421.44,1294.57 ccw(c2391.12,1294.57) D10.1@2412.56,1316.01
  Bottom Layer w10: v1@2235.7,1445.3 ccw(c2222.89,1458.11) 2241,1458.11 ccw(c2259.11,1458.11) v1@2246.3,1445.3 ; v1(2241,1440) 2241,1516 v1(2246,1521) ; 2241,1490.82 cw(c2276.18,1490.82) v1@2251.3,1515.7
HOST_TXD3: C7.2 D11.1 R7.2 | length 988.7
  Top Layer w10: D11.1@2440,1193.14 2494.7,1193.14 2508.55,1207 2508.55,1454.45 v1(2500,1463) ; D11.1@2457.1,1179.97 cw(c2488.89,1148.18) 2488.89,1193.14 cw(c2488.89,1238.1) D11.1@2457.1,1206.31 ; v1@2494.7,1457.7 cw(c2461.24,1424.24) 2508.55,1424.24 ; v1@2501.77,1464.77 cw(c2485.38,1448.38) 2508.55,1448.38 ; v1@2502.48,1542.48 cw(c2552,1492.96) C7.2@2552,1562.99 ; v1(2504,1544) 2535.49,1575.49 ; v1@2504,1551.5 ccw(c2504,1569.61) 2516.8,1556.8 ccw(c2529.61,1544) v1@2511.5,1544 ; 2519.55,1559.55 cw(c2552,1527.1) C7.2@2552,1572.99 ; 2527.24,1567.24 cw(c2536.34,1558.13) C7.2@2544.97,1567.69 ; 2534.68,1574.68 cw(c2543.4,1565.96) C7.2@2551.67,1575.12 ; C7.2@2536.62,1576.62 cw(c2552,1561.24) C7.2@2552,1582.99 ; C7.2@2542.49,1571.04 ccw(c2535.49,1567.76) 2535.49,1575.49 ; C7.2@2542.49,1579.94 cw(c2535.49,1583.22) 2535.49,1575.49 ; C7.2@2559.42,1568.07 cw(c2577.35,1550.14) 2577.35,1575.49 cw(c2577.35,1600.84) C7.2@2559.42,1582.92 ; 2588.22,1575.49 cw(c2588.22,1538.22) R7.2@2614.58,1564.58 ; 2605.08,1575.49 ccw(c2605.08,1588.92) R7.2@2614.58,1579.42 ; R7.2@2622,1570 2616.51,1575.49 C7.2@2552,1575.49 2535.49,1575.49
  Bottom Layer w10: v1(2500,1463) 2519,1482 2519,1529 v1(2504,1544) ; v1@2500,1470.5 ccw(c2500,1488.61) 2512.8,1475.8 ccw(c2525.61,1463) v1@2507.5,1463
HOST_TXD4: C8.2 D12.1 R8.2 | length 1194
  Top Layer w10: D12.1@2440,1091.71 2500.07,1091.71 2526.35,1118 2526.35,1435.35 2542,1451 v1(2664,1451) ; D12.1@2457.1,1078.55 cw(c2488.89,1046.76) 2488.89,1091.71 cw(c2488.89,1136.67) D12.1@2457.1,1104.88 ; v1@2658.7,1445.7 ccw(c2645.89,1432.89) 2645.89,1451 ccw(c2645.89,1469.11) v1@2658.7,1456.3 ; v1(2854,1456) 2850,1456 2874,1480 R8.2@2916,1480 2911.49,1484.51 C8.2@2911.49,1545 ; v1@2861.5,1456 cw(c2889.26,1456) 2869.63,1475.63 ; C8.2@2904.07,1537.58 cw(c2886.14,1519.65) 2911.49,1519.65 cw(c2936.84,1519.65) C8.2@2918.92,1537.58 ; R8.2@2906.58,1472.58 ccw(c2888.65,1454.65) 2888.65,1480 ccw(c2888.65,1505.35) 2906.58,1487.42 ccw(c2894.71,1499.29) 2911.49,1499.29 ; 2911.49,1511.41 ccw(c2945.41,1511.41) R8.2@2921.42,1487.42
  Bottom Layer w10: v1(2664,1451) 2849,1451 v1(2854,1456) ; v1@2669.3,1445.7 cw(c2682.11,1432.89) 2682.11,1451 cw(c2682.11,1469.11) v1@2669.3,1456.3 ; 2823.82,1451 ccw(c2823.82,1486.18) v1@2848.7,1461.3
HOST_TXD5: C11.2 D13.1 R11.2 | length 948.7
  Top Layer w10: D13.1@2440,990.29 2480.29,990.29 ; D13.1@2459.05,979.41 cw(c2480.28,964.13) 2480.28,990.29 ; D13.1@2459.05,1001.16 ccw(c2480.28,1016.45) 2480.28,990.29 ; v1@2513.5,1031 cw(c2495.39,1031) 2508.2,1018.2 cw(c2521,1005.39) v1@2521,1023.5 ; v1(2521,1031) 2480.29,990.29 ; v1(2641,1033) 2642,1032 2828,1032 2927,1131 R11.2@2927,1144 2927,1206.49 C11.2@2922.49,1211 ; v1@2646.3,1027.7 cw(c2656.69,1017.31) 2656.69,1032 ; v1@2646.3,1038.3 ccw(c2661.52,1053.52) 2661.52,1032 ; 2896.47,1100.47 ccw(c2852.94,1144) R11.2@2914.5,1144 ; 2913.54,1117.54 ccw(c2887.08,1144) R11.2@2924.5,1144 ; C11.2@2917.07,1203.58 cw(c2893.08,1179.59) 2927,1179.59 ; R11.2@2919.58,1151.42 ccw(c2901.65,1169.35) 2927,1169.35 ccw(c2952.35,1169.35) R11.2@2934.42,1151.42 ; 2927,1191.71 cw(c2943.78,1191.71) C11.2@2931.92,1203.58
  Bottom Layer w10: v1(2521,1031) 2523,1033 2544,1033 v1(2641,1033) ; v1@2526.3,1025.7 cw(c2543.94,1008.07) 2543.94,1033 ; v1@2526.3,1036.3 ccw(c2534.28,1044.28) 2534.28,1033 ; v1@2635.7,1027.7 ccw(c2622.89,1014.89) 2622.89,1033 ccw(c2622.89,1051.11) v1@2635.7,1038.3
HOST_TXD6: C12.2 D14.1 R12.2 | length 1044
  Top Layer w10: D14.1@2445,888.86 2474.86,888.86 ; D14.1@2447.96,877.52 ccw(c2450.62,908.28) D14.1@2472.45,886.45 ; D14.1@2448.82,887.48 ccw(c2453.04,936.23) 2487.63,901.63 ; D14.1@2449.68,897.45 ccw(c2455.45,964.17) 2502.81,916.81 ; D14.1@2450.54,907.41 ccw(c2457.87,992.12) v1(2518,932) 2474.86,888.86 ; D14.1@2466.59,882.91 cw(c2474.86,880.13) 2474.86,888.86 ; D14.1@2466.59,894.8 ccw(c2474.86,897.58) 2474.86,888.86 ; v1@2510.5,932 cw(c2492.39,932) 2505.2,919.2 cw(c2518,906.39) v1@2518,924.5 ; v1(2646,932) 2772,932 2826,878 C12.2@2926.49,878 2926,877.51 R12.2@2926,813 ; v1@2651.3,926.7 cw(c2664.11,913.89) 2664.11,932 cw(c2664.11,950.11) v1@2651.3,937.3 ; C12.2@2917.07,870.58 ccw(c2899.14,852.65) 2899.14,878 ccw(c2899.14,903.35) C12.2@2917.07,885.42 ; R12.2@2918.58,820.42 ccw(c2900.65,838.35) 2926,838.35 ccw(c2951.35,838.35) R12.2@2933.42,820.42 ; C12.2@2919.07,870.58 cw(c2902.33,853.84) 2926,853.84 ; 2926,851.47 cw(c2953.03,851.47) C12.2@2933.92,870.58
  Bottom Layer w10: v1(2518,932) 2545,932 v1(2646,932) ; v1@2523.3,926.7 cw(c2536.11,913.89) 2536.11,932 cw(c2536.11,950.11) v1@2523.3,937.3 ; v1@2640.7,926.7 ccw(c2627.89,913.89) 2627.89,932 ccw(c2627.89,950.11) v1@2640.7,937.3
HOST_TXD7: C15.2 D15.1 R15.2 | length 1059.4
  Top Layer w10: D15.1@2445,787.43 2492.43,740 v1(2507,740) ; D15.1@2448.94,768.81 cw(c2448.94,733.35) 2474.01,758.42 ; D15.1@2457.56,787.43 ccw(c2487.88,787.43) D15.1@2466.44,765.99 ; D15.1@2467.56,787.43 ccw(c2522.02,787.43) 2483.51,748.92 ; 2469.32,763.11 ccw(c2507,800.79) v1@2507,747.5 ; 2486.39,746.04 ccw(c2507,766.64) v1@2507,737.5 ; R15.2@2796.58,531.42 ccw(c2778.65,549.35) 2804,549.35 ccw(c2829.35,549.35) R15.2@2811.42,531.42 ; R15.2@2811.42,514.58 cw(c2829.35,496.65) 2829.35,522 cw(c2829.35,547.35) R15.2@2811.42,529.42 ; v1@2815.5,710 cw(c2797.39,710) 2810.2,697.2 cw(c2823,684.39) v1@2823,702.5 ; v1(2823,710) 2804,691 R15.2@2804,522 2863.51,522 C15.2@2864,521.51 ; 2837.47,522 cw(c2837.47,494.97) C15.2@2856.58,514.08 ; 2839.84,522 ccw(c2839.84,545.67) C15.2@2856.58,528.93
  Bottom Layer w10: v1@2505.23,738.23 ccw(c2522.69,755.69) 2522.69,731 ; v1(2507,740) 2516,731 2802,731 v1(2823,710) ; v1@2512.3,745.3 ccw(c2546.83,779.83) 2546.83,731 ; v1@2815.5,710 ccw(c2797.39,710) 2810.2,722.8 ccw(c2823,735.61) v1@2823,717.5
HOST_TXD8: C16.2 D16.1 R16.2 | length 642.1
  Top Layer w10: R16.2@2411,535 2471.49,535 C16.2@2473,536.51 2473,585 2473,687 ; R16.2@2418.42,527.58 cw(c2436.35,509.65) 2436.35,535 cw(c2436.35,560.35) R16.2@2418.42,542.42 ; D16.1@2435.77,672.83 cw(c2345.89,582.95) 2473,582.95 ; D16.1@2442.84,679.9 cw(c2370.03,607.09) 2473,607.09 ; 2446.47,535 cw(c2446.47,507.97) C16.2@2465.58,527.08 ; 2448.84,535 ccw(c2448.84,558.67) C16.2@2465.58,541.93 ; D16.1@2449.91,686.97 cw(c2394.17,631.23) 2473,631.23 ; D16.1@2456.98,694.05 cw(c2418.31,655.38) 2473,655.38 ; D16.1@2464.05,701.12 cw(c2442.45,679.52) 2473,679.52 ; C16.2@2465.58,545.93 ccw(c2447.65,563.86) 2473,563.86 ccw(c2498.35,563.86) C16.2@2480.42,545.93
IRED_RXD_EN: U2.75
KEY_INT1: U2.45
KEY_INT2: U2.46
LCD_SCL: U2.43
LCD_SDA: U2.42
LED_EN: U2.66
LVDIN: U2.77
M65_RF_POWER: U2.65
M_RF_R\E\R\C\V\: U2.31
M_RFTX: U2.6